# Altium PCB PCB1.PcbDoc
Units mm, origin at the board's own origin, x right, y up, seen from the top; angles counter-clockwise.
Board outline 152.4 x 101.6 mm, 2 copper layers (Top Layer, Bottom Layer), stack 1.571 mm thick; 9 components, 6 nets, 20 pads, 0 vias.
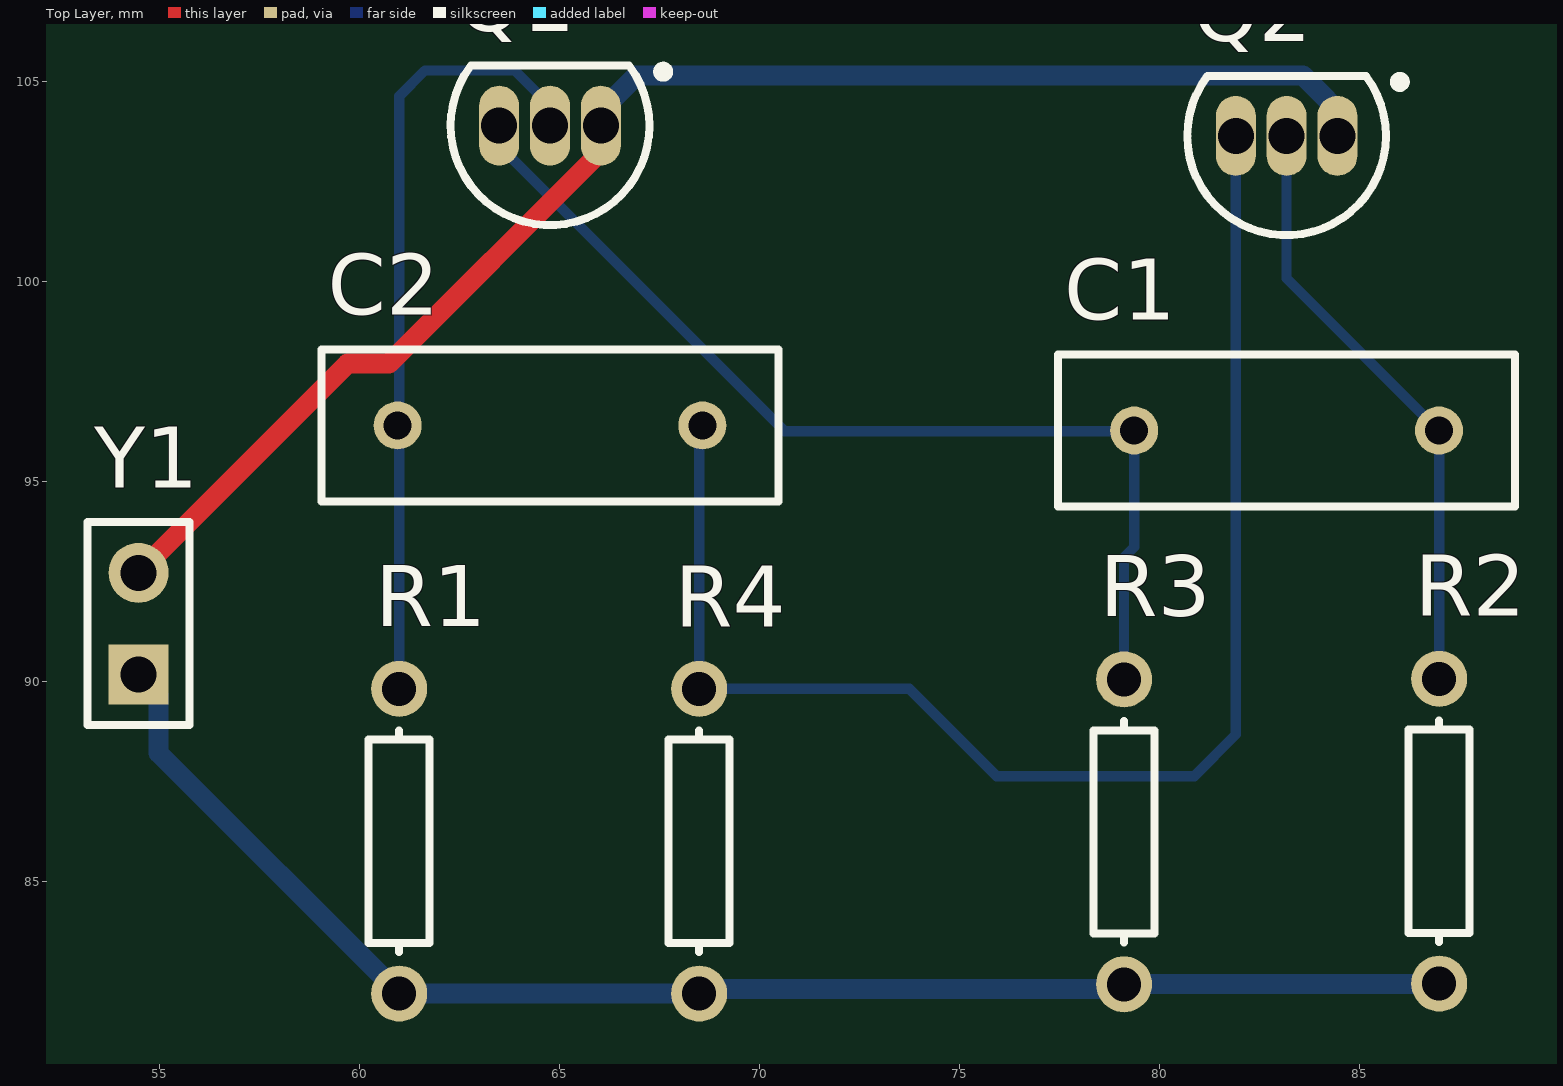
[diagram p0: Top Layer view]
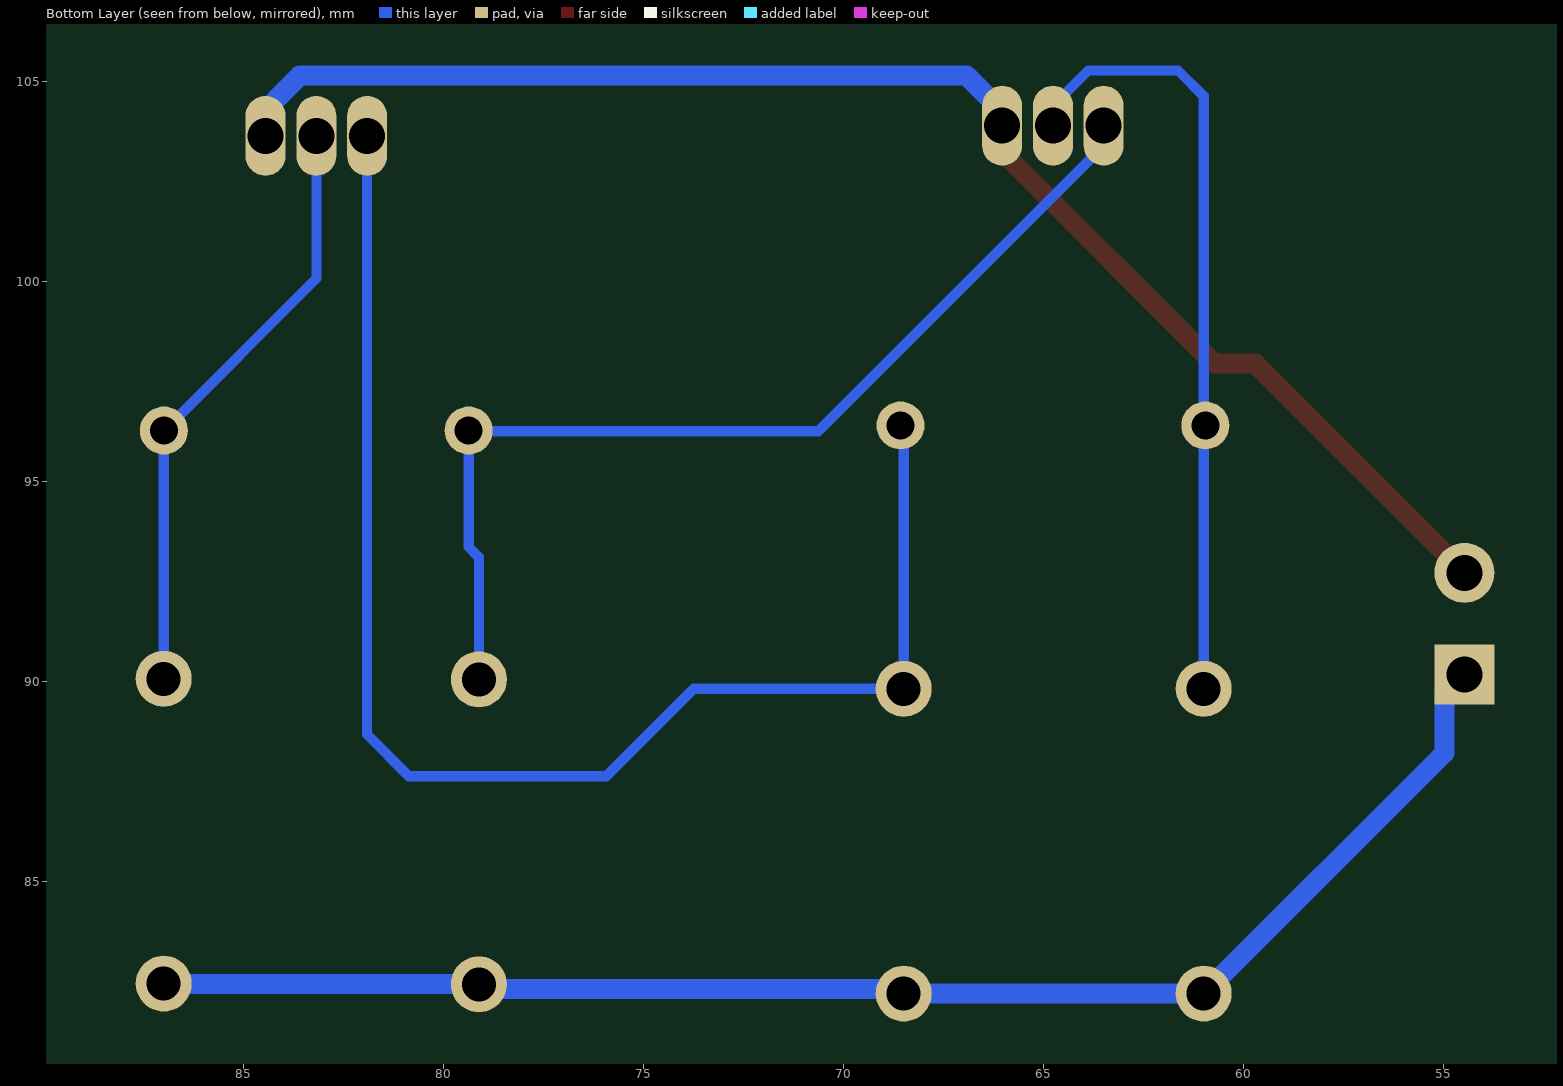
[diagram p1: Bottom Layer view, seen from below]

## Layer stack, top to bottom
Top Solder: solder mask 0.0102, Solder Resist, Dk 3.5
Top Layer: signal copper 0.0356
Dielectric 1: dielectric 1.5, FR-4, Dk 4.8
Bottom Layer: signal copper 0.0356
Bottom Solder: solder mask 0.0102, Solder Resist, Dk 3.5

## Board outline
25.4,25.4 177.8,25.4 177.8,127 25.4,127

## Design rules (kind name [scope] priority, off if disabled: settings)
Clearance [All] p1: gap=0.254 ignorepadtopadclearanceinfootprint=FALSE except(0: Arc-Hole Track-Hole SMDPad-Hole THPad-Hole Via-Hole Fill-Hole Poly-Hole Region-Hole Text-Hole)
PolygonConnect [All] p1: connectstyle=Relief reliefconductorwidth=0.254 reliefentries=4 polygonreliefangle="90 Angle" airgapwidth=0.254
RoomDefinition Sheet1 [InComponentClass('Sheet1')] p1: confinementstyle=ConfineIn formatcopy=TRUE lockcomponents=FALSE outline 178.943,26.924 220.345,26.924 220.345,41.402 178.943,41.402
RoutingVias [All] p1: holewidth=0.711 width=1.27 viastyle="Through Hole" minholewidth=0.711 minwidth=1.27 maxholewidth=0.711 maxwidth=1.27
SolderMaskExpansion [All] p1: expansion=0.102 istentingtop=FALSE
Width Width_GND [InNet('GND')] p1: maxlimit=0.5 minlimit=0.5 preferedwidth=0.5 // GND  Net Route Width
Width Width_12V [InNet('12V')] p2: maxlimit=0.5 minlimit=0.5 preferedwidth=0.5
Width [All] p3: maxlimit=0.254 minlimit=0.254 preferedwidth=0.254
30 further rules are at their usual default settings.

## Components (designator, comment, footprint, x,y, rotation, side; value= is the part's Value field where it differs from the comment)
C1 "20nF" RAD-0.3 83.185,96.266 r0 top
C2 "20nF" RAD-0.3 64.77,96.393 r0 top
Q1 "2N3904" TO-92A 64.77,103.886 r90 top
Q2 "2N3904" TO-92A 83.185,103.632 r90 top
R1 "100K" AXIAL-0.3 61,86 r270 top
R2 "100K" AXIAL-0.3 87,86.25 r270 top
R3 "1K" AXIAL-0.3 79.121,86.233 r270 top
R4 "1K" AXIAL-0.3 68.5,86 r270 top
Y1 "Header 2" HDR1X2 54.483,90.17 r90 top

## Footprints (in the part's own frame and the unit in brackets; to place one, negate y for a bottom-side part, rotate by r counter-clockwise, add the part's x,y. Pads: shape width x height; smd on the part's side, far side on the other; paste and mask are expansions set on the pad)
AXIAL-0.3 [mm] "Axial Device, Thru-Hole; 2 Leads; 0.3 in Pin Spacing"
  round 1.4 hole 0.85: 1(-3.81,0) 2(3.81,0)
  silkscreen extent -2.77,-0.76 2.77,0.76
HDR1X2 [mm] "Connector; Header; 2 Position"
  rect 1.5x1.5 hole 0.9: 1(0,0)
  round 1.5 hole 0.9: 2(2.54,0)
  silkscreen extent -1.27,-1.27 3.81,1.27
RAD-0.3 [mm] "Radial Cap, Thru-Hole; 2 Leads; 0.3 in Pin Spacing"
  round 1.2 hole 0.7: 1(-3.81,0) 2(3.81,0)
  silkscreen extent -5.71,-1.91 5.71,1.91
TO-92A [mm] "TO, Flat Index; 3 In-Line, Axial Leads; Body Dia. 4.5mm; Leads 0.51 x 0.48 mm (max)"
  oval 2x1 hole 0.9: 1(0,-1.27) 2(0,0) 3(0,1.27)
  silkscreen extent -2.48,-2.96 1.5,2.48, body extent -2.48,-2.5 1.5,2.5, height 6.86

## Part data
C1 C2: library part Cap, "Capacitor", LatestRevisionDate=17-Jul-2002, LatestRevisionNote="Re-released for DXP Platform.", PackageDescription="Radial Cap, Thru-Hole; 2 Leads; 0.3 in Pin Spacing", PackageReference=RAD-0.3, Published=8-Jun-2000, Publisher="Altium Limited"
Q1 Q2: "NPN General Purpose Amplifier", ComponentLink1Description="Manufacturer Link", ComponentLink1URL=http://www.fairchildsemi.com/, ComponentLink2Description=Datasheet, ComponentLink2URL=http://www.fairchildsemi.com/ds/2N%2F2N3904.pdf, DatasheetVersion=1997, LatestRevisionDate=15-Jan-2003, LatestRevisionNote="PCB Footprint 'BCY-W3/D4.7' replaced", PackageDescription="TO, Flat Index; 3 In-Line, Axial Leads; Body Dia. 4.5mm; Leads 0.51 x 0.48 mm (max)", PackageReference=TO-92A, PackageVersion=Sep-1998, Published=8-Jun-2000, Publisher="Altium Limited"
R1 R2 R3 R4: library part Res1, "Resistor", LatestRevisionDate=17-Jul-2002, LatestRevisionNote="Re-released for DXP Platform.", PackageDescription="Axial Device, Thru-Hole; 2 Leads; 0.3 in Pin Spacing", PackageReference=AXIAL-0.3, Published=8-Jun-2000, Publisher="Altium Limited"
Y1: "Header, 2-Pin", LatestRevisionDate=17-Jul-2002, LatestRevisionNote="Re-released for DXP Platform.", Publisher="Altium Limited"

## Nets (pads, with @x,y where several pads share a name; then routed paths per layer and width w, separated by ;. In a path a pad name is that pad's centre, name@x,y a point inside that pad or via, vN(x,y) a via of type N, cw(c..) or ccw(c..) an arc to the next point about the centre after c; other vN are vias at no path point)
12V: R1.2 R2.2 R3.2 R4.2 Y1.1 | length 36.8
  Bottom Layer w0.5: Y1.1 54.983,89.67 54.983,88.207 R1.2 R4.2 68.616,82.306 79.004,82.306 R3.2 79.13,82.432 86.991,82.432 R2.2
GND: Q1.1 Q2.1 Y1.2 | length 36.7
  Top Layer w0.5: Y1.2 59.709,97.936 60.74,97.936 65.944,103.14 65.944,103.79 Q1.1
  Bottom Layer w0.5: Q1.1 66.04,104.251 66.925,105.136 83.601,105.136 84.189,104.548 84.189,104.533 84.455,104.267 Q2.1
NetC1_1: C1.1 Q1.3 R3.1 | length 25.6
  Bottom Layer w0.254: Q1.3 63.5,103.386 70.636,96.25 79.226,96.25 79.375,96.101 79.375,93.354 79.121,93.1 R3.1
NetC1_2: C1.2 Q2.2 R2.1 | length 15.2
  Bottom Layer w0.254: Q2.2 83.185,100.065 87,96.25 R2.1
NetC2_1: C2.1 Q1.2 R1.1 | length 20.2
  Bottom Layer w0.254: R1.1 61,104.625 61.642,105.267 63.889,105.267 64.77,104.386 Q1.2 Q1.2@64.77,103.386
NetC2_2: C2.2 Q2.3 R4.1 | length 36.3
  Bottom Layer w0.254: C2.2@68.774,96.266 68.5,95.992 68.5,89.81 73.75,89.81 75.935,87.625 80.875,87.625 81.915,88.665 Q2.3

## Silkscreen, mask and mechanical layers (free items; w line width, h text height)
Mechanical 1:
  drawing of 2175 lines, arcs and shapes, not listed